# EAGLE board control_boardv9 (EAGLE 9.5.2)
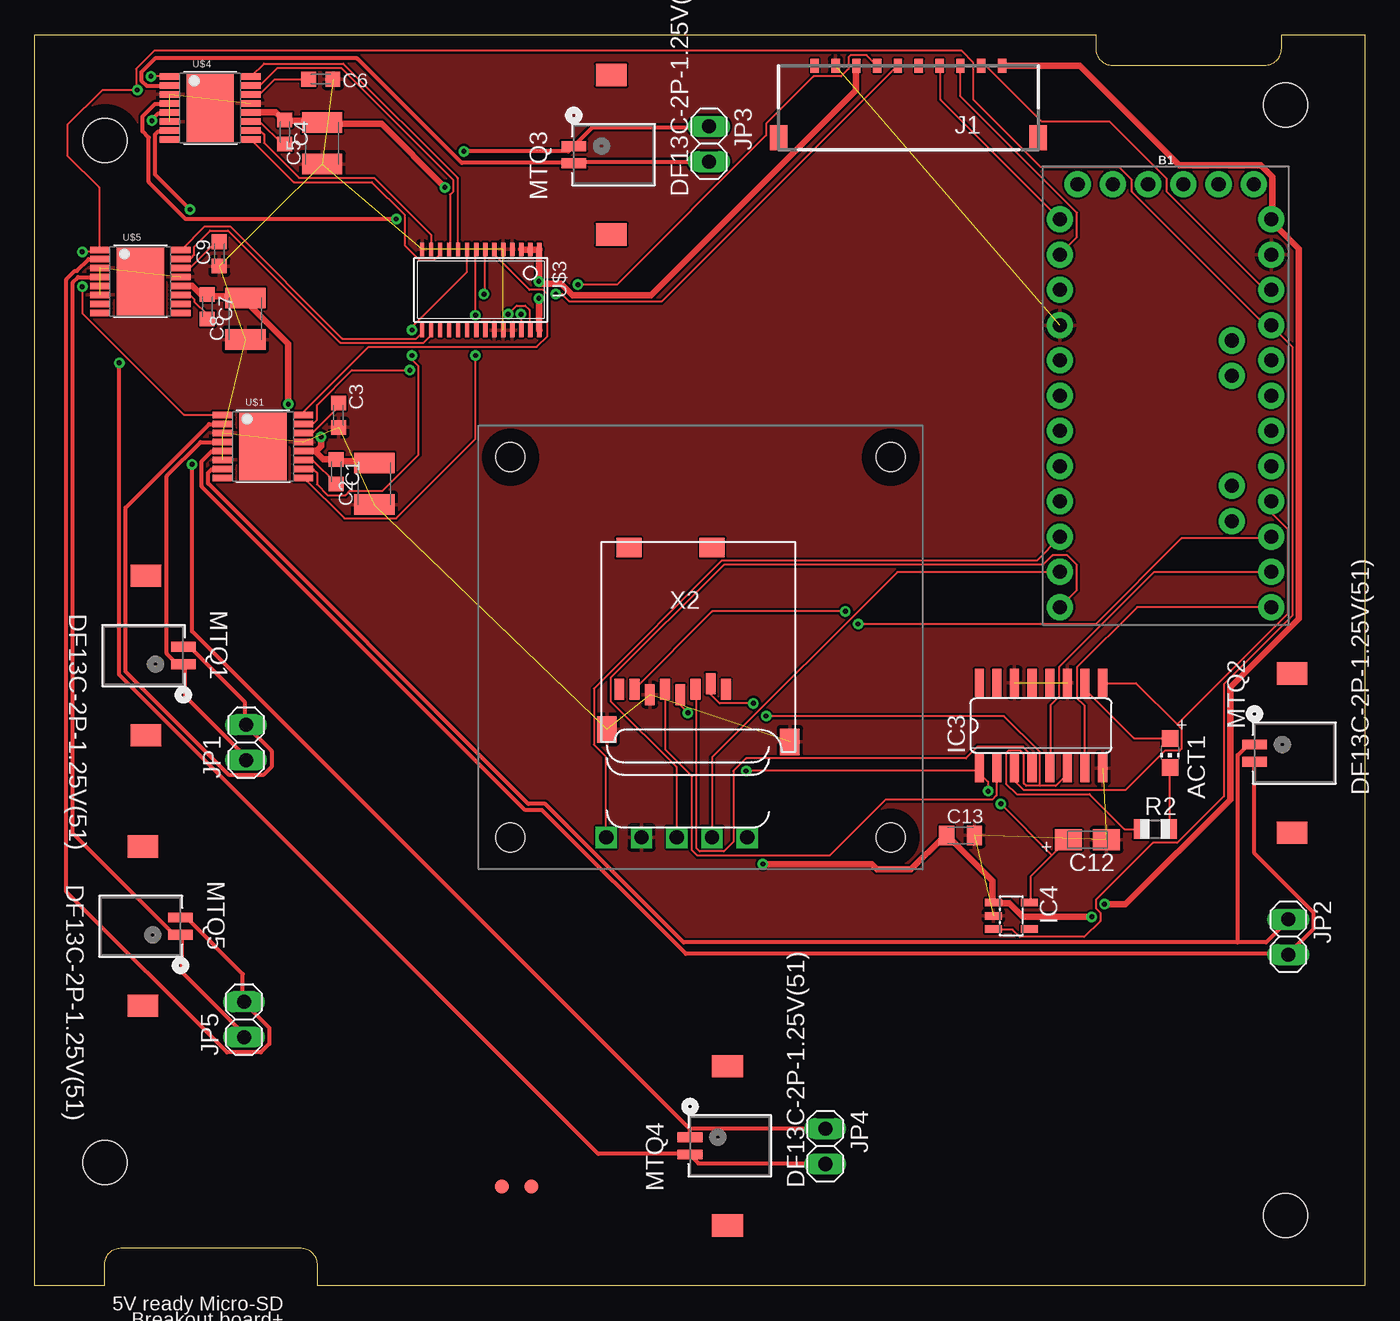
[diagram p0: board, top side]
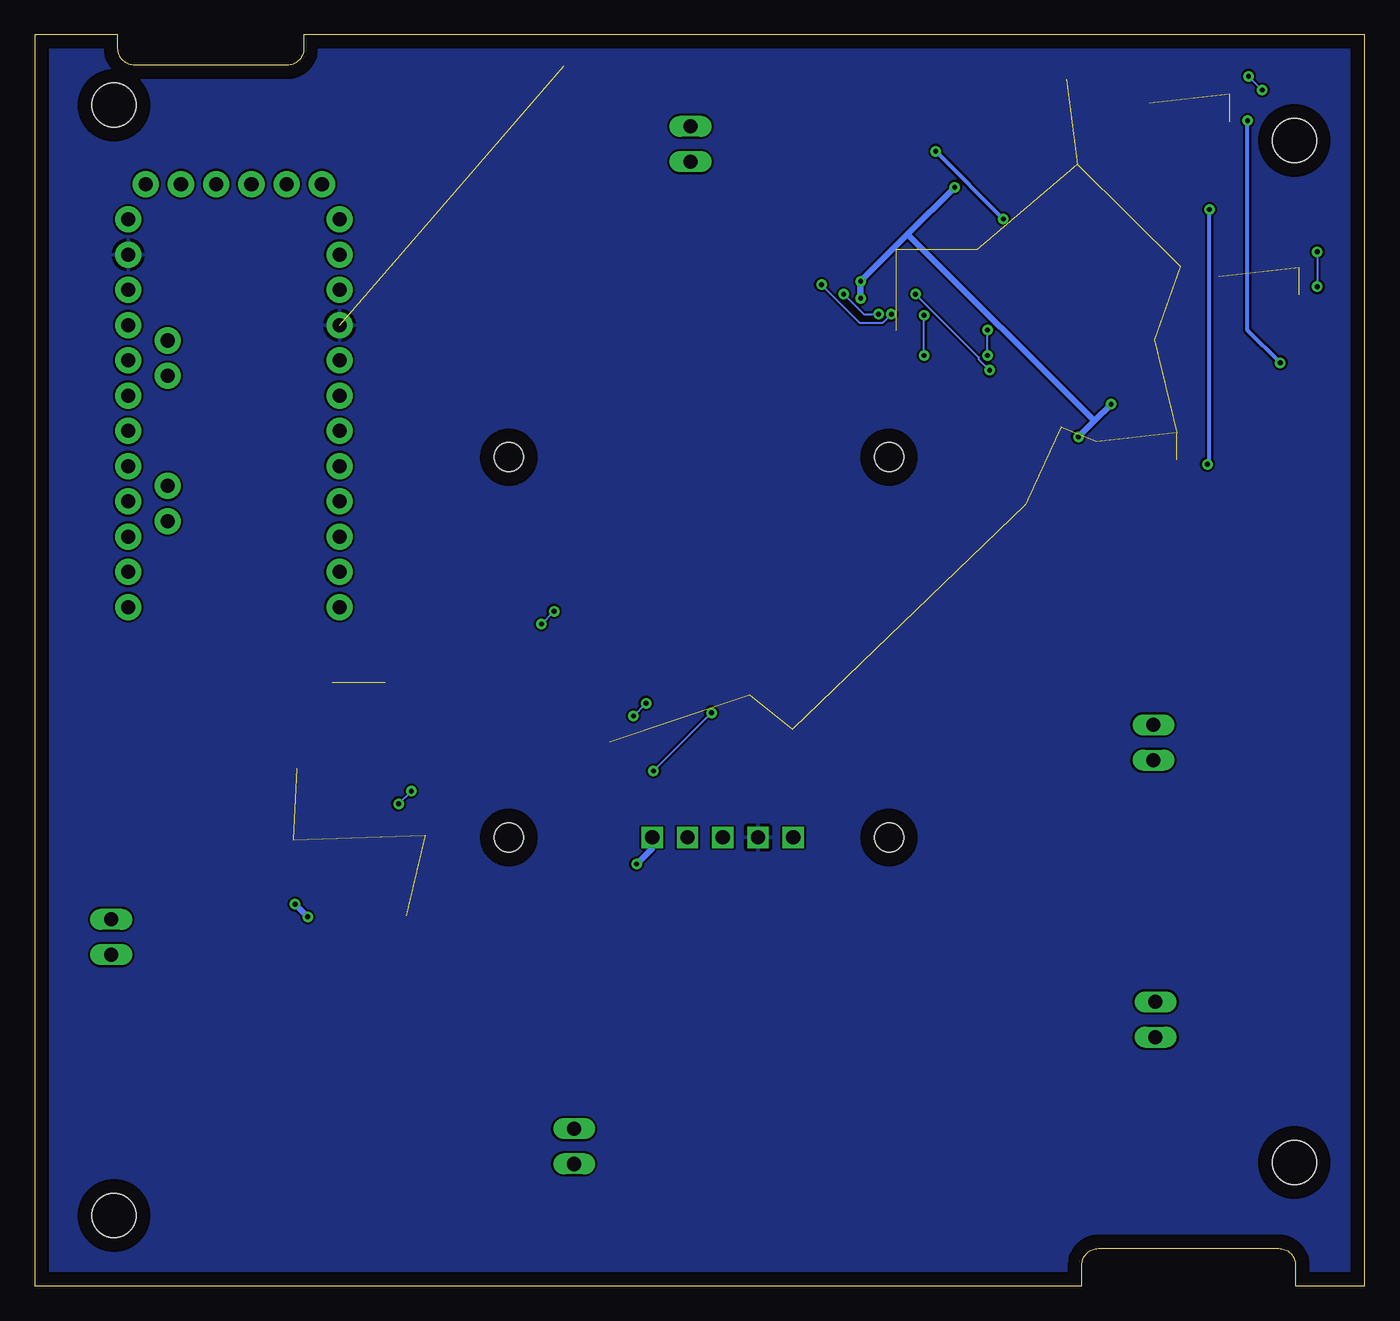
[diagram p1: board, bottom side, seen from below]

Size 95.89 x 90.17 mm. Coordinates in mm from the lower left corner, seen from the top.
Outline: 20.4,0 20.4,1.5 arc90 19.2,2.7 6.2,2.7 arc90 5,1.5 5,0 0,0 0,90.17 76.49,90.17 76.49,89.17 arc90 77.69,87.97 88.69,87.97 arc90 89.89,89.17 89.89,90.17 95.89,90.17 95.89,0 20.4,0
Copper layers (1*16): Top 0.035mm / dielectric 1.5mm / Bottom 0.035mm
Design rules "default": minimum track width 6mil, minimum drill 0.35mm, track to track 6mil, track to pad 6mil, pad to pad 6mil, via to via 6mil, smd to smd 6mil, copper to edge 40mil, drill to drill 6mil, minimum pad ring 10mil, minimum via ring 8mil, stop-mask expansion 4mil, vias tented up to drill 0mil, thermal gap 10mil
Net classes: 0 default: width 0.152 mm; 1 New Class: width 0.457 mm; 2 MTQs: width 0.305 mm
Holes 3.17 mm at 5.08,82.55 5.08,8.89 90.17,5.08 90.17,85.09

## Footprints (pad centres in the part's own frame; a part is rotated, then mirrored left to right if it is on the bottom)
CHIP-LED0805 = smd 1.2 x 1.2: A 0,-1.05; C 0,1.05
ARDUINO_PRO_MINI = drill 1.016 pad 1.88: 1 -7.62,12.7; 2 -7.62,10.16; 3 -7.62,7.62; 4 -7.62,5.08; 5 -7.62,2.54; 6 -7.62,0; 7 -7.62,-2.54; 8 -7.62,-5.08; 9 -7.62,-7.62; 10 -7.62,-10.16; 11 -7.62,-12.7; 12 -7.62,-15.24; 13 7.62,-15.24; 14 7.62,-12.7; 15 7.62,-10.16; 16 7.62,-7.62; 17 7.62,-5.08; 18 7.62,-2.54; 19 7.62,0; 20 7.62,2.54; 21 7.62,5.08; 22 7.62,7.62; 23 7.62,10.16; 24 7.62,12.7; A4 4.763,1.429; A5 4.763,3.969; A6 4.763,-9.049; A7 4.763,-6.509; BLK -6.35,15.24; GND -3.81,15.24; GRN 6.35,15.24; RXI 1.27,15.24; TXO 3.81,15.24; VCC -1.27,15.24
C0603K = smd 1.05 x 1.08: 1 -0.875,0; 2 0.875,0
C1210K = smd 1.5 x 2.9: 1 -1.5,0; 2 1.5,0
A/3216-18R = smd 1.95 x 1.5: + 1.375,0; - -1.375,0
C0805K = smd 1.1 x 1.4: 1 -1,0; 2 1,0
SO16 = smd 0.66 x 2.032: 1 -4.445,-3.073; 2 -3.175,-3.073; 3 -1.905,-3.073; 4 -0.635,-3.073; 5 0.635,-3.073; 6 1.905,-3.073; 7 3.175,-3.073; 8 4.445,-3.073; 9 4.445,3.073; 10 3.175,3.073; 11 1.905,3.073; 12 0.635,3.073; 13 -0.635,3.073; 14 -1.905,3.073; 15 -3.175,3.073; 16 -4.445,3.073
SOT23-5L = smd 0.55 x 1.2: 1 -0.95,-1.3; 2 0,-1.3; 3 0.95,-1.3; 4 0.95,1.3; 5 -0.95,1.3
504050-1091 = smd 0.6 x 1: 1 -13.5,0; 2 -12,0; 3 -10.5,0; 4 -9,0; 5 -7.5,0; 6 -6,0; 7 -4.5,0; 8 -3,0; 9 -1.5,0; 10 0,0 | smd 1.25 x 1.8: 11 2.605,5.19; 12 -16.105,5.19
1X02 = drill 1.016 long: 1 -1.27,0; 2 1.27,0
CON2_1X2_U_DF13 = smd 0.711 x 1.778: 1 0,0; 2 -1.25,0 | smd 1.6 x 2.21: 3 -6.365,-2.7; 5 5.115,-2.7
R0805 = smd 1.1 x 1.4: 1 -1,0; 2 1,0
HTSSOP16 = smd 1.5 x 0.45: P1 -2.9,2.275; P2 -2.9,1.625; P3 -2.9,0.975; P4 -2.9,0.325; P5 -2.9,-0.325; P6 -2.9,-0.975; P7 -2.9,-1.625; P8 -2.9,-2.275; P9 2.9,-2.275; P10 2.9,-1.625; P11 2.9,-0.975; P12 2.9,-0.325; P13 2.9,0.325; P14 2.9,0.975; P15 2.9,1.625; P16 2.9,2.275 | smd 3.4 x 5: PAD 0,0
UCAM-III = drill 1.02 square: 1 19.36,2.3; 2 16.82,2.3; 3 14.28,2.3; 4 11.74,2.3; 5 9.2,2.3 | hole 2.1: 2.3,2.3; 29.7,2.3; 29.7,29.7; 2.3,29.7
TSSOP28 = smd 0.305 x 0.991: 1 -4.225,-2.918; 2 -3.575,-2.918; 3 -2.925,-2.918; 4 -2.275,-2.918; 5 -1.625,-2.918; 6 -0.975,-2.918; 7 -0.325,-2.918; 8 0.325,-2.918; 9 0.975,-2.918; 10 1.625,-2.918; 11 2.275,-2.918; 12 2.925,-2.918; 13 3.575,-2.918; 14 4.225,-2.918; 15 4.225,2.918; 16 3.575,2.918; 17 2.925,2.918; 18 2.275,2.918; 19 1.625,2.918; 20 0.975,2.918; 21 0.325,2.918; 22 -0.325,2.918; 23 -0.975,2.918; 24 -1.625,2.918; 25 -2.275,2.918; 26 -2.925,2.918; 27 -3.575,2.918; 28 -4.225,2.918
FIDUCIAL_1MM = smd 1 x 1: 1 0,0
MICROSD = smd 0.7 x 1.5: 1 9,-10.64; 2 7.9,-10.24; 3 6.8,-10.64; 4 5.7,-11.04; 5 4.6,-10.64; 6 3.5,-11.04; 7 2.4,-10.64; 8 1.3,-10.64 | smd 1.8 x 1.4: CD1 2,-0.44; CD2 8,-0.44 | smd 1.4 x 1.9: MT1 0.4,-13.54; MT2 13.6,-14.44

## Placement (x,y rotation side)
ACT1  RED  [CHIP-LED0805]  81.84,38.4 180 top
B1  ARDUINO_PRO_MINI  [ARDUINO_PRO_MINI]  81.53,64.16 0 top
C1  0.01uF  [C0603K]  21.74,58.67 270 top
C2  10uF  [C1210K]  24.49,57.81 90 top
C3  2.2uF  [C0603K]  21.89,62.74 90 top
C4  0.01uF  [C0603K]  18.03,83.16 270 top
C5  10uF  [C1210K]  20.73,82.35 90 top
C6  2.2uF  [C0603K]  20.62,86.97 180 top
C7  0.01uF  [C0603K]  12.45,70.56 270 top
C8  10uF  [C1210K]  15.19,69.7 90 top
C9  2.2uF  [C0603K]  13.31,74.37 90 top
C12  10uF/10V  [A/3216-18R]  75.9,32.16 180 top
C13  0.1uF  [C0805K]  66.75,32.46 0 top
IC3  4050D  [SO16]  72.54,40.39 0 top
IC4  LP298XS  [SOT23-5L]  70.41,26.67 270 top
J1  504050-1091  [504050-1091]  56.24,87.93 180 top
JP1  [1X02]  15.24,39.17 90 top
JP2  [1X02]  90.37,25.15 270 top
JP3  [1X02]  48.62,82.3 270 top
JP4  [1X02]  57,10.06 270 top
JP5  [1X02]  15.09,19.2 90 top
MTQ1  DF13C-2P-1.25V(51)  [CON2_1X2_U_DF13]  10.72,44.81 270 top
MTQ2  DF13C-2P-1.25V(51)  [CON2_1X2_U_DF13]  87.93,39.01 90 top
MTQ3  DF13C-2P-1.25V(51)  [CON2_1X2_U_DF13]  38.86,82.14 90 top
MTQ4  DF13C-2P-1.25V(51)  [CON2_1X2_U_DF13]  47.24,10.72 90 top
MTQ5  DF13C-2P-1.25V(51)  [CON2_1X2_U_DF13]  10.52,25.3 270 top
R2  1K  [R0805]  80.77,32.92 0 top
U$1  DRV8833PWP  [HTSSOP16]  16.46,60.5 0 top
U$2  UCAM-III  [UCAM-III]  32,30.02 0 top
U$3  PCA9685PW  [TSSOP28]  32.16,71.78 180 top
U$4  DRV8833PWP  [HTSSOP16]  12.65,84.89 0 top
U$5  DRV8833PWP  [HTSSOP16]  7.62,72.39 0 top
U$6  FIDUCIAL  [FIDUCIAL_1MM]  33.68,7.16 0 top
U$7  FIDUCIAL  [FIDUCIAL_1MM]  35.81,7.16 0 top
X2  MICROSD  [MICROSD]  40.84,53.64 0 top

## Library data of the parts
ACT1 C12 C13 IC4 R2 U$6 U$7 X2 = adafruit
B1 = SparkFun-Boards
C1-C9 = rcl; SPICEPREFIX: C
IC3 = 40xx
J1 = molex_10pin; DESCRIPTION: Pico-Lock SMT Wire-to-Board Header 10way Molex 504050 Series, 1.5mm Pitch 10 Way 1 Row Right Angle PCB Header, SMT Termination, 3A; HEIGHT: mm; MANUFACTURER_NAME: Molex; MANUFACTURER_PART_NUMBER: 504050-1091; MOUSER_PART_NUMBER: 538-504050-1091; MOUSER_PRICE-STOCK: https://www.mouser.com/Search/Refine.aspx?Keyword=538-504050-1091
JP1-JP5 = pinhead
MTQ1-MTQ5 = myparts; BUILT_BY: EMA_UL_Team; MANUFACTURER_PART_NUMBER: DF13C-2P-1.25V(51); VENDOR: Hirose
U$1-U$5 = myparts

## Nets
5V_1 [New Class]: C1.1 C2.2 C4.1 C5.2 C7.1 C8.2 J1.8 U$1.P12 U$3.1 U$3.2 U$3.3 U$3.28 U$4.P12 U$5.P12
5V_2 [New Class]: B1.24 C13.1 IC4.1 J1.1 U$2.1
+3V3: C12.+ IC3.1 IC4.5 X2.4
CD: X2.CD1
CLK: B1.16 IC3.3 IC3.9
CS: B1.13 IC3.7
DI: B1.14 IC3.5
DO: B1.15 X2.7
GND [New Class]: B1.4 B1.23 C2.1 C3.1 C5.1 C6.1 C8.1 C9.1 C12.- C13.2 IC3.8 IC3.11 IC3.14 IC4.2 J1.9 U$1.P3 U$1.P6 U$1.P13 U$2.4 U$3.4 U$3.5 U$3.14 U$3.23 U$3.24 U$3.25 U$4.P3 U$4.P6 U$4.P13 U$5.P3 U$5.P6 U$5.P13 X2.6 X2.MT1 X2.MT2
MTQ1_A: U$1.P16 U$3.6
MTQ1_B: U$1.P15 U$3.7
MTQ2_A: U$1.P9 U$3.8
MTQ2_B: U$1.P10 U$3.9
MTQ3_A: U$3.10 U$4.P16
MTQ3_B: U$3.11 U$4.P15
MTQ4_A: U$3.12 U$4.P9
MTQ4_B: U$3.13 U$4.P10
MTQ5_A: U$3.15 U$5.P16
MTQ5_B: U$3.16 U$5.P15
N$1 [MTQs]: JP3.2 MTQ3.2 U$4.P2
N$2: C3.2 U$1.P14
N$3 [MTQs]: JP1.1 MTQ1.1 U$1.P4
N$4 [MTQs]: JP1.2 MTQ1.2 U$1.P2
N$5 [MTQs]: JP2.1 MTQ2.1 U$1.P7
N$6 [MTQs]: JP2.2 MTQ2.2 U$1.P5
N$7: C1.2 U$1.P11
N$8 [MTQs]: JP4.1 MTQ4.1 U$4.P7
N$9 [MTQs]: JP4.2 MTQ4.2 U$4.P5
N$10: C6.2 U$4.P14
N$11: C4.2 U$4.P11
N$12 [MTQs]: JP3.1 MTQ3.1 U$4.P4
N$13 [MTQs]: JP5.2 MTQ5.2 U$5.P2
N$14 [New Class]: U$1.PAD
N$15 [New Class]: U$4.PAD
N$16: C9.2 U$5.P14
N$17: C7.2 U$5.P11
N$18 [MTQs]: JP5.1 MTQ5.1 U$5.P4
N$19 [New Class]: U$5.PAD
N$22: ACT1.A IC3.10
N$23: IC3.2 X2.5
N$24: IC3.6 R2.1 X2.2
N$25: ACT1.C R2.2
N$26: IC3.4 X2.3
N$27: B1.10 U$2.5
RST: B1.22 J1.2
RX: B1.12 U$2.3
RXI: B1.2 J1.3
SCL: J1.6 U$3.26
SDA: J1.7 U$3.27
TX: B1.11 U$2.2
TXO: B1.1 J1.4
VCC: B1.21 IC4.3 U$1.P1 U$4.P1 U$5.P1

## Tracks (layer width: path | path; a pad name or v marks a point on that pad's centre or on a via)
5V_1  (via drill 0.35)
  Top 0.457: U$5.P12 10.59,72.08 11.35,72.08 11.96,71.48 12.42,71.48 C7.1 12.65,71.32 15.09,71.32 15.16,71.25 C8.2 15.32,71.02 15.32,70.87 18.29,67.89 v18.29,63.55 | 20.27,60.12 20.19,60.2 19.43,60.2 U$1.P12 | 20.27,60.12 20.8,59.59 21.72,59.59 C1.1 21.95,59.44 24.38,59.44 24.46,59.36 C2.2 | v20.65,61.19 20.65,60.5 20.27,60.12 | U$4.P12 15.62,84.58 17.37,84.58 17.83,84.12 C4.1 18.06,83.97 20.65,83.97 20.73,83.9 C5.2 20.88,83.74 24.99,83.74 v29.57,79.17 | U$3.3 35.13,74.68 35.66,74.68 U$3.2 35.97,74.68 36.35,74.68 | v36.35,71.17 36.35,68.89 U$3.28 | 36.35,74.68 v36.35,72.39 36.5,72.24 37.95,72.24 38.79,71.4 44.42,71.4 59.21,86.18 59.21,87.94 J1.8 | 36.35,74.68 U$3.1
  Bottom 0.457: v20.65,61.19 19.51,62.33 | 19.51,62.33 v18.29,63.55 | v36.35,71.17 v36.35,72.39 32.96,75.78 | 32.96,75.78 v29.57,79.17 | 32.96,75.78 19.51,62.33
5V_2  (via drill 0.35)
  Top 0.457: v52.5,30.4 60.35,30.4 60.73,30.02 63.17,30.02 65.53,32.38 C13.1 69.04,29.18 69.04,27.66 IC4.1 69.34,27.58 70.26,27.58 71.25,26.59 v76.2,26.59 | J1.1 75.36,87.94 82.53,80.77 88.39,80.77 89.23,79.93 89.23,76.96 89.15,76.89 B1.24 89.23,76.66 91.14,74.75 91.14,48.08 86.18,43.13 86.18,35.05 78.64,27.51 v77.11,27.51
  Bottom 0.457: v52.5,30.4 51.44,31.47 51.44,32.31 U$2.1 | v77.11,27.51 v76.2,26.59
+3V3  (via drill 0.35)
  Top 0.152: 73.34,31.05 74.45,32.16 C12.+ | 73.34,31.05 71.78,29.49 71.78,27.66 IC4.5 | v47.09,41.3 46.56,41.83 46.56,42.6 X2.4 | v51.28,37.11 67.89,37.11 IC3.1 67.97,37.11 68.73,36.35 v68.73,35.66 | v69.65,34.75 73.34,31.05
  Bottom 0.152: v51.28,37.11 v47.09,41.3 | v68.73,35.66 v69.65,34.75
CLK
  Top 0.152: IC3.3 70.64,36.42 71.32,35.74 78.64,35.74 81.46,38.56 82.53,38.56 82.68,38.71 82.68,40.16 82.37,40.46 | 82.37,40.46 79.4,43.43 77.04,43.43 IC3.9 | B1.16 89.15,55.7 90.37,54.48 90.37,48.46 82.37,40.46
CS
  Top 0.152: B1.13 79.48,48.92 75.13,44.58 75.13,42.37 75.67,41.83 75.67,37.34 IC3.7
DI
  Top 0.152: IC3.5 73.23,37.34 73.23,41.83 73.84,42.44 73.84,44.58 80.7,51.44 89.15,51.44 B1.14
DO  (via drill 0.35)
  Top 0.152: v58.45,48.62 48.84,48.62 43.28,43.05 X2.7 | v59.36,47.7 76.5,47.7 82.68,53.87 89.08,53.87 89.15,53.95 B1.15
  Bottom 0.152: v59.36,47.7 v58.45,48.62
GND  (23 unrouted)
  pour Top: -3.2,95.25 99.36,95.25 105.46,89.15 105.46,6.4 96.01,-3.05 -1.07,-3.05 -4.11,0 -4.11,94.34
  pour Bottom: -2.59,93.73 95.71,93.73 100.58,88.85 101.35,88.09 101.35,-12.34 -5.94,-12.34 -8.53,-9.75 -8.53,87.78
MTQ1_A
  Top 0.152: U$3.6 33.15,74.68 33.15,74.3 35.66,71.78 36.65,71.78 36.96,71.48 36.96,68.43 36.2,67.67 24.08,67.67 19.43,63.02 19.43,62.79 U$1.P16
MTQ1_B  (via drill 0.35)
  Top 0.152: v32.38,71.48 32.46,71.55 32.46,74.68 U$3.7 | v27.05,65.99 22.86,65.99 20.34,63.48 20.34,62.41 20.12,62.18 19.43,62.18 U$1.P15
  Bottom 0.152: v32.38,71.48 27.81,66.9 27.81,66.75 v27.05,65.99
MTQ2_A  (via drill 0.35)
  Top 0.152: v31.77,69.95 31.77,74.68 U$3.8 | v31.77,67.06 31.77,61.04 26.06,55.32 22.33,55.32 19.43,58.22 U$1.P9
  Bottom 0.152: v31.77,67.06 v31.77,69.95
MTQ2_B  (via drill 0.35)
  Top 0.152: v27.2,68.89 27.2,69.11 31.17,73.08 31.17,74.68 U$3.9 | v27.2,67.06 27.2,66.75 27.66,66.29 27.66,59.89 25.07,57.3 22.71,57.3 22.4,57 21.11,57 20.34,57.76 20.34,58.6 20.12,58.83 19.43,58.83 U$1.P10
  Bottom 0.152: v27.2,67.06 v27.2,68.89
MTQ3_A
  Top 0.152: U$3.10 30.48,74.75 30.48,79.86 22.25,88.09 16.54,88.09 15.62,87.17 U$4.P16
MTQ3_B
  Top 0.152: U$3.11 29.95,74.75 29.95,78.64 30.18,78.87 30.18,79.7 22.1,87.78 17.53,87.78 16.31,86.56 15.62,86.56 U$4.P15
MTQ4_A
  Top 0.152: U$3.12 29.18,74.68 29.18,74.3 28.8,73.91 27.74,73.91 26.67,74.98 26.67,77.19 24.31,79.55 18.67,79.55 15.62,82.6 U$4.P9
MTQ4_B
  Top 0.152: U$3.13 28.57,74.75 28.57,75.74 24.46,79.86 19.05,79.86 16.54,82.37 16.54,82.98 16.31,83.21 15.62,83.21 U$4.P10
MTQ5_A
  Top 0.152: U$3.15 27.89,68.81 27.89,68.66 27.51,68.28 22.17,68.28 14.1,76.35 12.27,76.35 10.59,74.68 U$5.P16
MTQ5_B
  Top 0.152: U$3.16 28.57,68.81 28.57,68.5 28.04,67.97 22.02,67.97 13.95,76.05 12.65,76.05 11.51,74.91 11.51,74.3 11.28,74.07 10.59,74.07 U$5.P15
N$1
  Top 0.305: U$4.P2 9.68,86.49 8.08,86.49 7.7,86.87 7.7,87.48 8.69,88.47 23.24,88.47 30.79,80.92 38.86,80.92 MTQ3.2 38.94,81 48.62,81 JP3.2
N$2
  Top 0.152: C3.2 21.87,63.55 21.87,63.32 20.04,61.49 19.43,61.49 U$1.P14
N$3
  Top 0.305: U$1.P4 13.49,60.81 11.96,60.81 9.53,58.37 9.53,45.57 10.29,44.81 MTQ1.1 10.82,44.73 10.82,42.52 15.24,38.1 JP1.1
N$4
  Top 0.305: U$1.P2 13.49,62.1 12.57,62.1 6.55,56.08 6.55,44.27 14.02,36.8 16.46,36.8 17.07,37.41 17.07,38.56 15.24,40.39 JP1.2 15.16,40.54 15.16,42.06 11.2,46.02 10.74,46.02 MTQ1.2
N$5
  Top 0.305: 86.72,24.77 88.77,24.77 90.37,26.36 JP2.1 | 86.72,24.77 46.79,24.77 36.8,34.75 35.59,34.75 12.5,57.84 12.5,58.6 12.72,58.83 13.49,58.83 U$1.P7 | MTQ2.1 87.48,39.01 86.72,38.25 86.72,24.77
N$6
  Top 0.305: U$1.P5 13.49,60.12 12.72,60.12 12.04,59.44 12.04,57.61 35.36,34.29 36.58,34.29 46.94,23.93 90.37,23.93 JP2.2 90.45,24 92.2,25.76 92.2,26.9 87.94,31.17 MTQ2.2
N$7
  Top 0.152: C1.2 21.72,57.84 20.04,59.51 19.43,59.51 U$1.P11
N$8  (via drill 0.35)
  Top 0.305: v11.2,77.57 8.69,80.09 8.69,82.98 8.91,83.21 9.68,83.21 U$4.P7 | v11.35,59.21 11.35,47.17 47.24,11.28 | MTQ4.1 47.24,11.28 | JP4.1 57,11.35 47.32,11.35 47.24,11.28
  Bottom 0.305: v11.2,77.57 11.2,59.36 v11.35,59.21
N$9  (via drill 0.35)
  Top 0.305: v8.46,83.97 8.46,84.05 8.91,84.51 9.68,84.51 U$4.P5 | v6.1,66.52 6.1,44.04 40.62,9.53 47.24,9.53 MTQ4.2 47.32,9.37 47.85,8.84 57,8.84 JP4.2
  Bottom 0.305: v8.46,83.97 8.46,68.89 v6.1,66.52
N$10
  Top 0.152: C6.2 19.74,86.94 17.3,86.94 16.23,85.88 15.62,85.88 U$4.P14
N$11
  Top 0.152: C4.2 17.98,82.3 17.83,82.3 16.23,83.9 15.62,83.9 U$4.P11
N$12  (via drill 0.35)
  Top 0.305: v26.06,76.89 10.9,76.89 8.23,79.55 8.23,82.75 7.77,83.21 7.77,84.28 8.69,85.19 9.68,85.19 U$4.P4 | v30.94,81.76 38.48,81.76 MTQ3.1 40.23,83.52 48.62,83.52 JP3.1
  Bottom 0.305: v30.94,81.76 v26.06,76.89
N$13
  Top 0.305: U$5.P2 4.65,73.99 3.89,73.99 3.05,73.15 2.9,73.15 2.29,72.54 2.29,28.42 13.87,16.84 16.31,16.84 16.92,17.45 16.92,18.59 15.09,20.42 JP5.2 15.01,20.57 15.01,22.48 10.97,26.52 10.52,26.52 MTQ5.2
N$16
  Top 0.152: C9.2 13.26,75.21 13.03,75.21 11.2,73.38 10.59,73.38 U$5.P14
N$17
  Top 0.152: C7.2 12.42,69.72 12.42,70.03 11.51,70.94 11.51,71.09 11.2,71.4 10.59,71.4 U$5.P11
N$18
  Top 0.305: U$5.P4 4.65,72.69 3.12,72.69 2.74,72.31 2.74,32.61 10.06,25.3 MTQ5.1 10.59,25.22 10.59,22.63 15.09,18.14 JP5.1
N$22
  Top 0.152: ACT1.A 81.84,39.47 79.25,39.47 75.74,42.98 75.74,43.43 IC3.10
N$23
  Top 0.152: X2.5 45.49,42.98 45.49,38.63 47.4,36.73 47.4,31.39 47.78,31.01 57.3,31.01 61.34,35.05 69.04,35.05 69.34,35.36 69.34,37.26 IC3.2
N$24  (via drill 0.35)
  Top 0.152: R2.1 78.56,32.92 76.05,35.43 70.79,35.43 70.03,36.2 70.03,38.41 70.18,38.56 71.09,38.56 71.32,38.33 71.32,36.2 71.48,36.04 72.47,36.04 | 72.47,36.04 73.61,36.04 74.45,36.88 IC3.6 | v51.82,41.99 49.38,41.99 48.77,42.6 48.77,43.36 X2.2 | v52.73,41.07 69.88,41.07 72.47,38.48 72.47,36.04
  Bottom 0.152: v52.73,41.07 v51.82,41.99
N$25
  Top 0.152: ACT1.C 81.84,32.92 R2.2
N$26
  Top 0.152: X2.3 47.7,42.98 47.7,31.55 47.93,31.32 49.68,31.32 50.37,32 50.37,37.11 51.28,38.02 67.13,38.02 67.97,38.86 71.25,38.86 71.86,38.25 71.86,37.34 IC3.4
N$27
  Top 0.152: U$2.5 41.15,32.38 41.15,38.18 40.31,39.01 40.31,43.05 49.53,52.27 72.24,52.27 73.91,53.95 B1.10
RST
  Top 0.152: J1.2 68.58,87.94 72.62,83.9 77.5,83.9 81.61,79.78 81.61,78.87 88.7,71.78 B1.22
RX
  Top 0.152: B1.12 75.13,50.14 75.13,51.97 74.45,52.65 73.38,52.65 72.69,51.97 49.68,51.97 41.53,43.81 41.53,42.14 46.25,37.41 46.25,32.38 U$2.3
RXI
  Top 0.152: J1.3 66.75,87.94 66.75,85.72 75.13,77.34 75.13,75.59 73.91,74.37 B1.2
SCL  (via drill 0.35)
  Top 0.152: v35.05,70.03 35.05,68.89 U$3.26 | v37.57,71.48 38.02,71.48 38.56,70.94 45.19,70.94 62.18,87.94 J1.6
  Bottom 0.152: v35.05,70.03 36.12,70.03 v37.57,71.48
SDA  (via drill 0.35)
  Top 0.152: v34.14,70.03 34.75,70.64 35.36,70.64 35.66,70.33 35.66,68.89 U$3.27 | v39.17,72.16 41.99,72.16 52.73,82.91 52.73,83.74 56.16,87.17 58.14,87.17 58.67,87.71 58.67,88.54 58.83,88.7 59.97,88.7 J1.7
  Bottom 0.152: v34.14,70.03 34.75,69.42 36.42,69.42 v39.17,72.16
TX
  Top 0.152: U$2.2 48.84,32.38 48.84,38.1 62.18,51.44 73.91,51.44 B1.11
TXO
  Top 0.152: J1.4 65.3,87.94 65.3,85.5 73.91,76.89 B1.1
VCC  (via drill 0.35)
  Top 0.152: 7.32,86.18 4.88,86.18 2.36,83.67 2.36,81.46 4.65,79.17 4.65,74.68 U$5.P1 4.57,74.68 4.42,74.52 v3.43,74.52 | v8.38,87.17 9.68,87.17 U$4.P1 | v3.43,72.01 3.43,70.1 10.74,62.79 13.49,62.79 U$1.P1 | IC4.3 69.11,25.68 70.48,25.68 71.02,25.15 75.67,25.15 76.81,26.29 76.81,26.9 76.5,27.2 76.5,27.81 80.62,31.93 82.37,31.93 85.72,35.28 85.72,43.36 90.68,48.31 90.68,67.67 89.15,69.19 B1.21 89.15,69.27 88.7,69.27 79.1,78.87 79.1,79.7 78.18,80.62 72.54,80.62 67.67,85.5 67.67,88.16 66.83,89 8.61,89 7.32,87.71 7.32,86.18 | 7.32,86.18 v7.39,86.18
  Bottom 0.152: v8.38,87.17 v7.39,86.18 | v3.43,74.52 v3.43,72.01

## Text on the board
tPlace: 5V ready Micro-SD | Breakout board+ | adafruit.com